# EAGLE board 13A-777-A-XA (EAGLE 9.6.2)
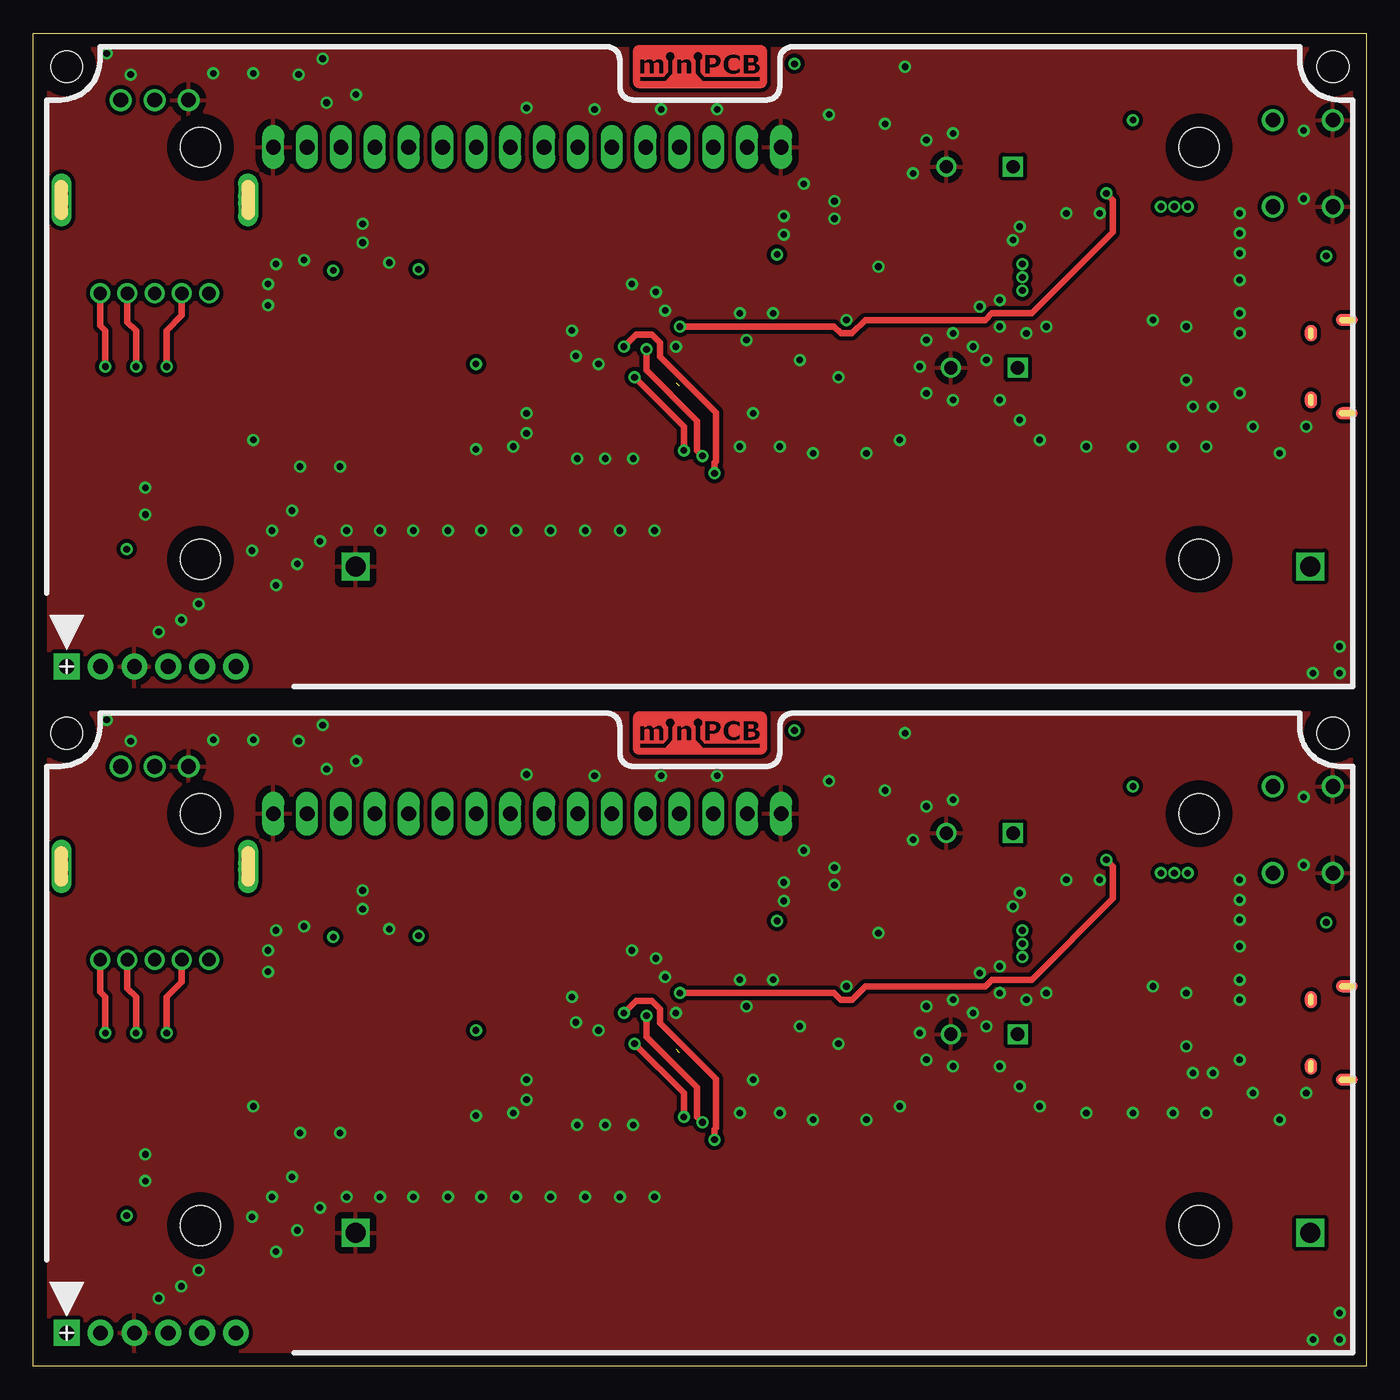
[diagram p0: board, top side]
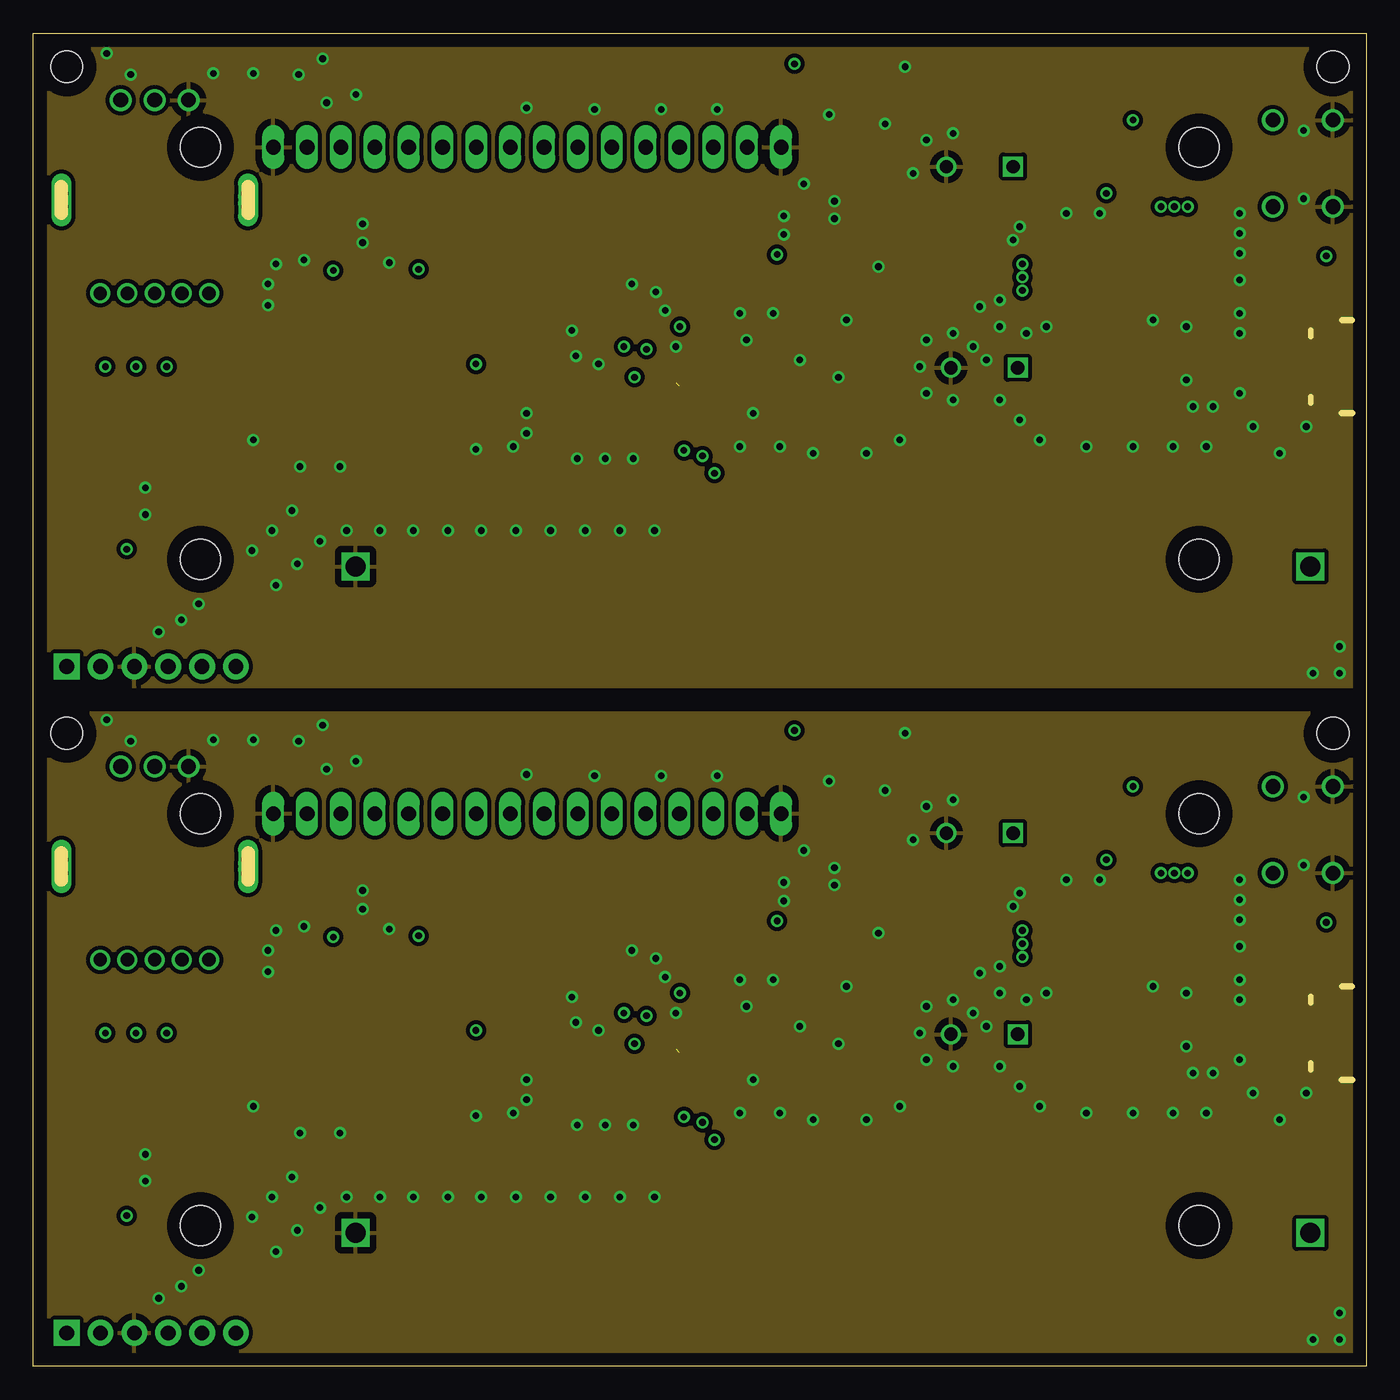
[diagram p1: board, inner layer Route2]
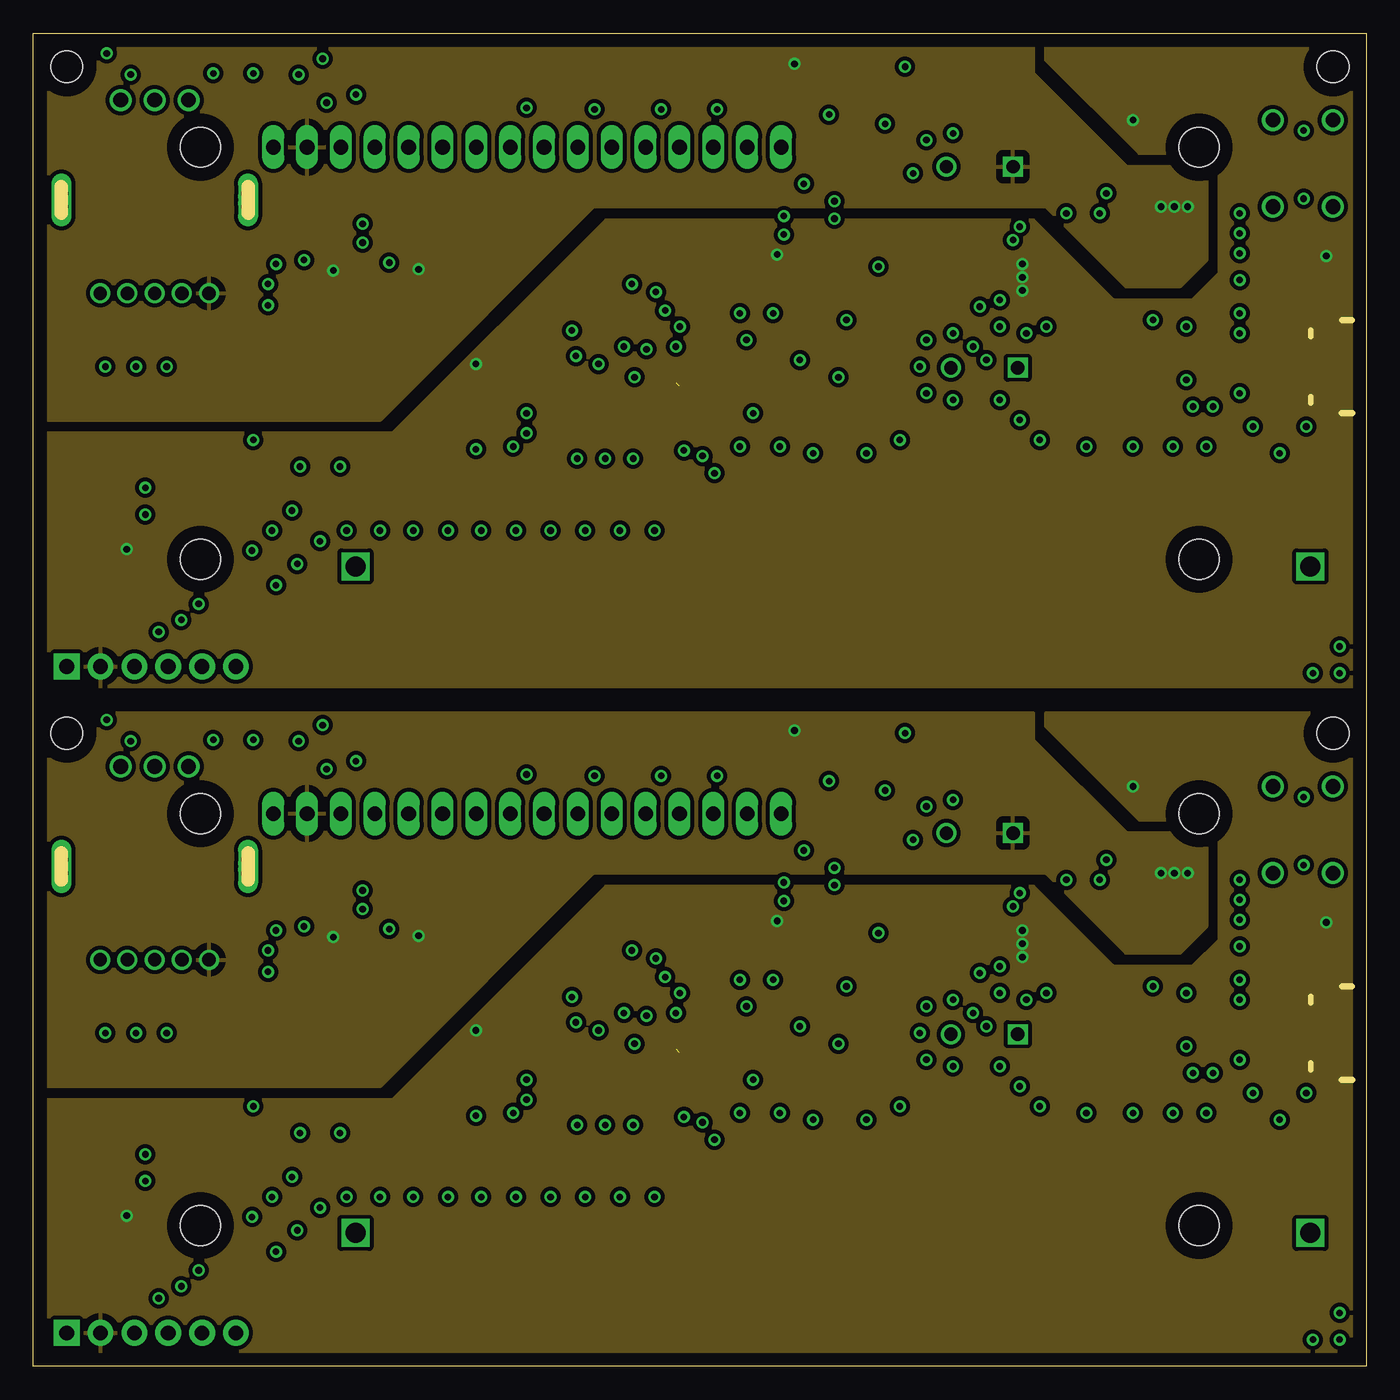
[diagram p2: board, inner layer Route15]
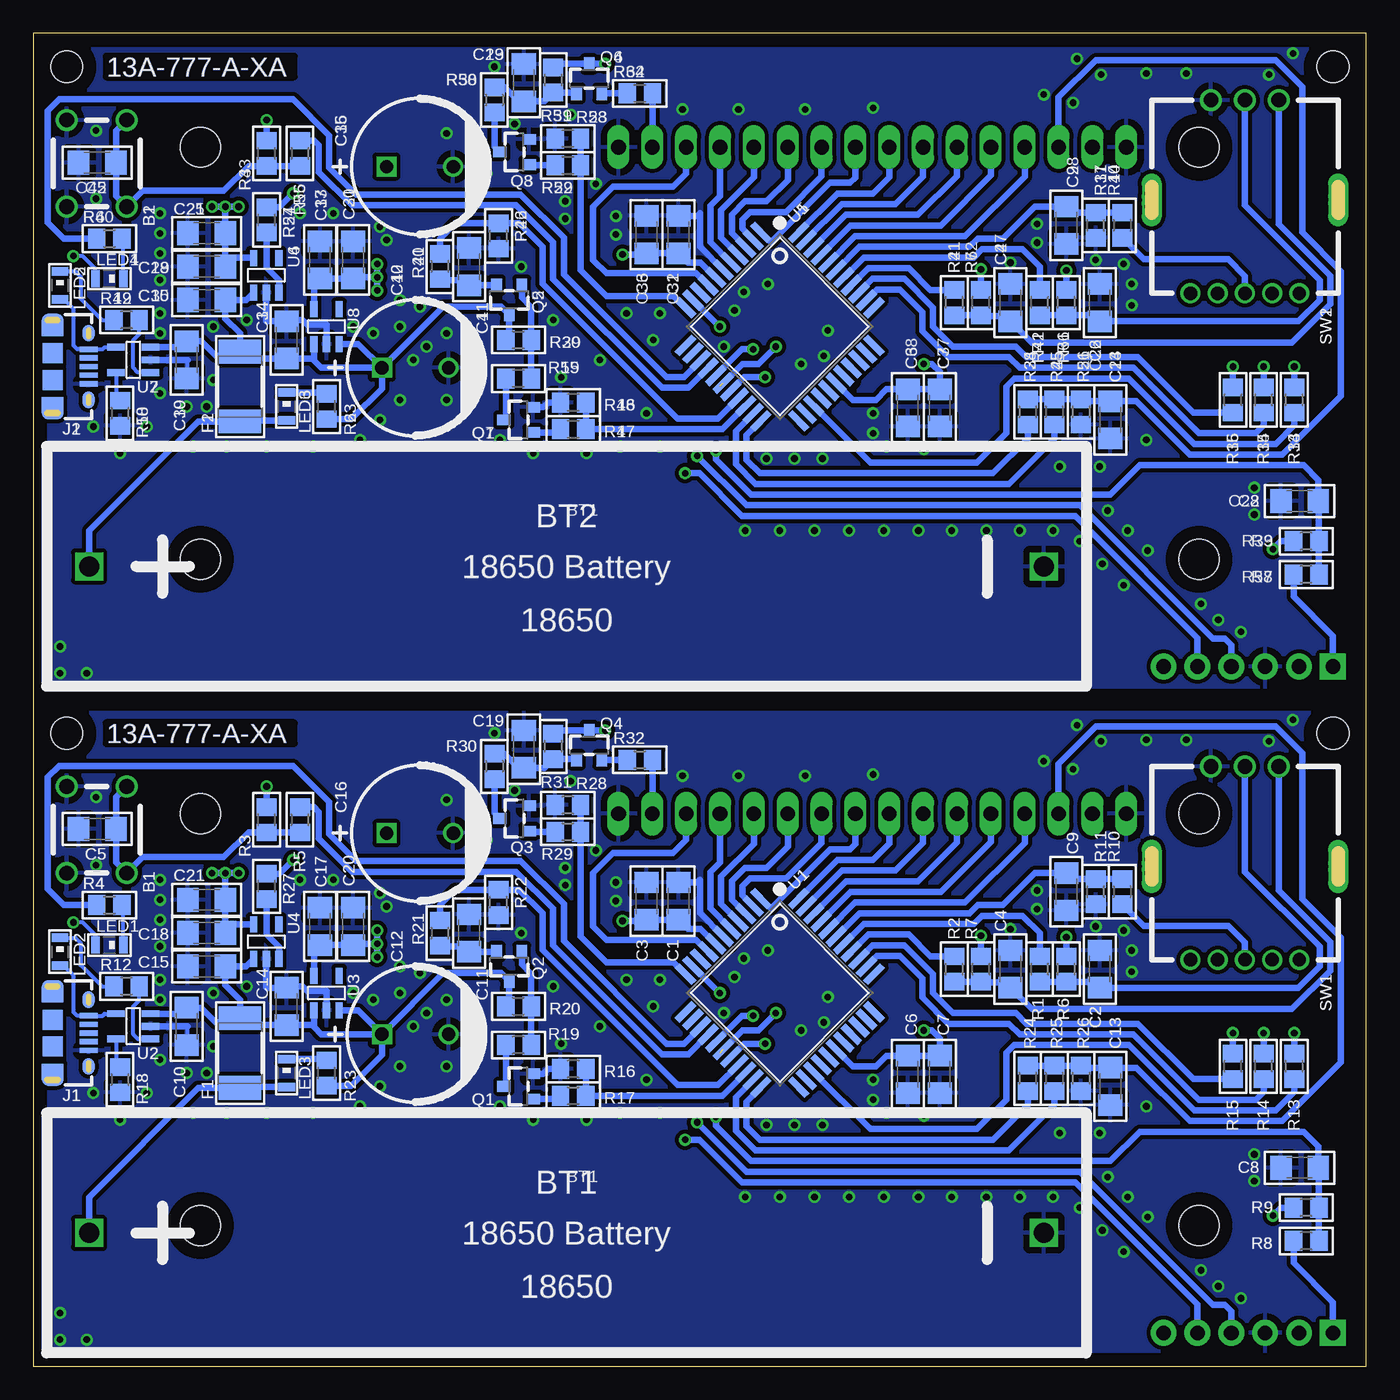
[diagram p3: board, bottom side, seen from below]

Size 100 x 100 mm. Coordinates in mm from the lower left corner, seen from the top.
Outline: 0,0 0,100 100,100 100,0 0,0
Copper layers (1+2*15+16): Top 0.035mm / dielectric 0.15mm / Route2 0.035mm / dielectric 0.15mm / Route15 0.035mm / dielectric 0.2mm / Bottom 0.035mm
Design rules "minipcb-SMD": minimum track width 0.25mm, minimum drill 0.5mm, track to track 0.3mm, track to pad 0.3mm, pad to pad 0.15mm, via to via 0.3mm, smd to smd 0.15mm, copper to edge 1mm, drill to drill 1mm, minimum pad ring 0.2mm, minimum via ring 0.2mm, stop-mask expansion 0.1mm, vias tented up to drill 0.55mm, thermal gap 0.5mm

## Footprints (pad centres in the part's own frame; a part is rotated, then mirrored left to right if it is on the bottom)
6X6MM = drill 1.1: 1.A 0,0; 2.A 6.5,0; 3.B 0,4.5; 4.B 6.5,4.5
BATTERY-18650-1-NOHOLES = drill 1.5 square: 1 35.82,0; + -35.82,0
C1206 = smd 1.6 x 1.8: + -1.4,0; - 1.4,0
C5MM = drill 1 square: + -2.5,0 | drill 1: - 2.5,0
1812L010DR = smd 1.78 x 3.15: 1 -2.615,0; 2 2.615,0
USB_MICRO = smd 0.4 x 1.35: 1 -1.3,1.35; 2 -0.65,1.35; 3 0,1.35; 4 0.65,1.35; 5 1.3,1.35 | smd 1.25 x 0.9: GND1 -2.5,1.35; GND4 2.5,1.35 | smd 1.25 x 0.9 bottom: GND2 -2.5,1.35; GND3 2.5,1.35 | smd 0.9 x 1.6: GND5 -3.5,-1.35; GND8 3.5,-1.35 | smd 0.9 x 1.6 bottom: GND6 -3.5,-1.35; GND9 3.5,-1.35 | smd 1.2 x 1.6: GND7 -2.9,-1.35; GND10 2.9,-1.35 | smd 1.5 x 1.5: XPAD3 -1,-1.35; XPAD4 1,-1.35
CHIP-LED0805 = smd 1.27 x 0.635: A 0,-1.05; C 0,1.05
MINIPCB_0P_50X100MM = hole 2.4: 97.5,47.5; 2.5,47.5
SOT23 = smd 0.8 x 1: 1 -0.95,-1.1; 2 0.95,-1.1; 3 0,1.1
R0805 = smd 1.3 x 1.5: 1 -0.95,0; 2 0.95,0
SWITCH-ROTARY_ENCODER-12MM = drill 1: 1 7,4.08; 2 7,2.04; 3 7,0; 4 7,-2.04; 5 7,-4.08 | drill 1.1: A -7.5,2.54; B -7.5,0; C -7.5,-2.54 | drill 1 long: GND1 -0.5,7; GND2 0.5,7; GND3 -0.5,-7; GND4 0.5,-7
SQFP-S-10X10-44 = smd 0.5 x 1.8: 1 -4,-6; 2 -3.2,-6; 3 -2.4,-6; 4 -1.6,-6; 5 -0.8,-6; 6 0,-6; 7 0.8,-6; 8 1.6,-6; 9 2.4,-6; 10 3.2,-6; 11 4,-6; 23 4,6; 24 3.2,6; 25 2.4,6; 26 1.6,6; 27 0.8,6; 28 0,6; 29 -0.8,6; 30 -1.6,6; 31 -2.4,6; 32 -3.2,6; 33 -4,6 | smd 1.8 x 0.5: 12 6,-4; 13 6,-3.2; 14 6,-2.4; 15 6,-1.6; 16 6,-0.8; 17 6,0; 18 6,0.8; 19 6,1.6; 20 6,2.4; 21 6,3.2; 22 6,4; 34 -6,4; 35 -6,3.2; 36 -6,2.4; 37 -6,1.6; 38 -6,0.8; 39 -6,0; 40 -6,-0.8; 41 -6,-1.6; 42 -6,-2.4; 43 -6,-3.2; 44 -6,-4
SOT-23-5_MC_MCH = smd 1.321 x 0.508: 1 -1.295,0.95; 2 -1.295,0; 3 -1.295,-0.95; 4 1.295,-0.95; 5 1.295,0.95
SOT25 = smd 0.55 x 1.2: 1 -0.95,-1.3; 2 0,-1.3; 3 0.95,-1.3; 4 0.95,1.3; 5 -0.95,1.3
PINS_6_PICKIT3 = drill 1.1 pad 1.93 square: 1 0,0 | drill 1.1 pad 1.93: 2 0,-2.54; 3 0,-5.08; 4 0,-7.62; 5 0,-10.16; 6 0,-12.7
LCD1602 = drill 1.1 long: 1 8,33.46; 2 10.54,33.46; 3 13.08,33.46; 4 15.62,33.46; 5 18.16,33.46; 6 20.7,33.46; 7 23.24,33.46; 8 25.78,33.46; 9 28.32,33.46; 10 30.86,33.46; 11 33.4,33.46; 12 35.94,33.46; 13 38.48,33.46; 14 41.02,33.46; 15 43.56,33.46; 16 46.1,33.46 | hole 3: 2.54,2.54; 2.54,33.46; 77.46,33.46; 77.46,2.54

## Placement (x,y rotation side)
B1  [6X6MM]  97.5,43.5 270 bottom
B2  [6X6MM]  97.5,93.5 270 bottom
BT1  18650  [BATTERY-18650-1-NOHOLES]  60,10 0 bottom
BT2  18650  [BATTERY-18650-1-NOHOLES]  60,60 0 bottom
C1  680n  [C1206]  51.6,34.9 90 bottom
C2  680n  [C1206]  20,29.8 90 bottom
C3  6n8  [C1206]  54,34.9 90 bottom
C4  680n  [C1206]  26.7,29.8 90 bottom
C5  680n  [C1206]  95.2,40.3 180 bottom
C6  680n  [C1206]  34.4,21.9 270 bottom
C7  6n8  [C1206]  32,21.9 270 bottom
C8  680n  [C1206]  5,14.9 180 bottom
C9  680n  [C1206]  22.5,35.6 270 bottom
C10  4u7  [C1206]  88.5,25.5 270 bottom
C11  680n  [C1206]  67.3,32.5 90 bottom
C12  22u 25V  [C5MM]  71.35,24.91 0 bottom
C13  680n  [C1206]  19.2,21 270 bottom
C14  680n  [C1206]  81,27 90 bottom
C15  680n  [C1206]  87,30 180 bottom
C16  22u 25V  [C5MM]  71,40 0 bottom
C17  6n8  [C1206]  78.5,33 90 bottom
C18  6n8  [C1206]  87,32.5 180 bottom
C19  680n  [C1206]  63.2,46.3 90 bottom
C20  680n  [C1206]  76,33 90 bottom
C21  680n  [C1206]  87,35 180 bottom
C22  680n  [C1206]  5,64.9 180 bottom
C23  680n  [C1206]  63.2,96.3 90 bottom
C24  680n  [C1206]  19.2,71 270 bottom
C25  680n  [C1206]  87,85 180 bottom
C26  680n  [C1206]  20,79.8 90 bottom
C27  680n  [C1206]  26.7,79.8 90 bottom
C28  680n  [C1206]  22.5,85.6 270 bottom
C29  6n8  [C1206]  87,82.5 180 bottom
C30  680n  [C1206]  87,80 180 bottom
C31  680n  [C1206]  76,83 90 bottom
C32  680n  [C1206]  51.6,84.9 90 bottom
C33  6n8  [C1206]  78.5,83 90 bottom
C34  680n  [C1206]  81,77 90 bottom
C35  22u 25V  [C5MM]  71,90 0 bottom
C36  6n8  [C1206]  54,84.9 90 bottom
C37  6n8  [C1206]  32,71.9 270 bottom
C38  680n  [C1206]  34.4,71.9 270 bottom
C39  4u7  [C1206]  88.5,75.5 270 bottom
C40  22u 25V  [C5MM]  71.35,74.91 0 bottom
C41  680n  [C1206]  67.3,82.5 90 bottom
C42  680n  [C1206]  95.2,90.3 180 bottom
E$1  [MINIPCB_PANEL_IMAGEFRAME]  -25,-30 0 top  (outside the outline)
F1  1A  [1812L010DR]  84.5,23.5 90 bottom
F2  1A  [1812L010DR]  84.5,73.5 90 bottom
J1  [USB_MICRO]  97.2,25 270 bottom
J2  [USB_MICRO]  97.2,75 270 bottom
LED1  [CHIP-LED0805]  94.3,31.6 270 bottom
LED2  [CHIP-LED0805]  98,31.1 0 bottom
LED3  [CHIP-LED0805]  81,22 0 bottom
LED4  [CHIP-LED0805]  94.3,81.6 270 bottom
LED5  [CHIP-LED0805]  98,81.1 0 bottom
LED6  [CHIP-LED0805]  81,72 0 bottom
PCB  PCB-50/100-0  [MINIPCB_0P_50X100MM]  0,0 0 top
PCB1  PCB-50/100-0  [MINIPCB_0P_50X100MM]  0,50 0 top
Q1  2N7002  [SOT23]  63.6,21 90 bottom
Q2  NTR2101P  [SOT23]  64.3,30 180 bottom
Q3  2N7002  [SOT23]  63.9,41.1 90 bottom
Q4  NTR2101P  [SOT23]  58.3,46.6 0 bottom
Q5  NTR2101P  [SOT23]  64.3,80 180 bottom
Q6  NTR2101P  [SOT23]  58.3,96.6 0 bottom
Q7  2N7002  [SOT23]  63.6,71 90 bottom
Q8  2N7002  [SOT23]  63.9,91.1 90 bottom
R1  10k  [R0805]  24.5,29.8 90 bottom
R2  10k  [R0805]  30.9,29.8 90 bottom
R3  10K  [R0805]  82.5,41 90 bottom
R4  150  [R0805]  94.3,34.6 0 bottom
R5  10K  [R0805]  80,41 270 bottom
R6  10k  [R0805]  22.5,29.8 90 bottom
R7  10k  [R0805]  28.9,29.8 90 bottom
R8  150  [R0805]  4.5,9.4 180 bottom
R9  10k  [R0805]  4.5,11.9 180 bottom
R10  10K  [R0805]  18.3,35.6 270 bottom
R11  499K  [R0805]  20.3,35.6 90 bottom
R12  150  [R0805]  93,28.5 180 bottom
R13  150  [R0805]  5.4,22.5 90 bottom
R14  150  [R0805]  7.7,22.5 90 bottom
R15  150  [R0805]  10,22.5 90 bottom
R16  10k  [R0805]  59.5,22.3 180 bottom
R17  10k  [R0805]  59.5,20.3 0 bottom
R18  2K  [R0805]  93.5,21.5 270 bottom
R19  10k  [R0805]  63.6,24.1 180 bottom
R20  499K  [R0805]  63.6,27 0 bottom
R21  4K99  [R0805]  69.5,32.5 270 bottom
R22  4K99  [R0805]  65.1,34.8 90 bottom
R23  150  [R0805]  78,22 90 bottom
R24  1K  [R0805]  25.4,21.6 270 bottom
R25  1K  [R0805]  23.4,21.6 270 bottom
R26  1K  [R0805]  21.4,21.6 270 bottom
R27  150  [R0805]  82.5,36 90 bottom
R28  10k  [R0805]  59.9,42.1 180 bottom
R29  10k  [R0805]  59.9,40.1 0 bottom
R30  10k  [R0805]  65.4,45 270 bottom
R31  499K  [R0805]  61,46.5 270 bottom
R32  150  [R0805]  54.5,45.5 0 bottom
R33  10k  [R0805]  4.5,61.9 180 bottom
R34  150  [R0805]  5.4,72.5 90 bottom
R35  150  [R0805]  7.7,72.5 90 bottom
R36  150  [R0805]  10,72.5 90 bottom
R37  499K  [R0805]  20.3,85.6 90 bottom
R38  1K  [R0805]  25.4,71.6 270 bottom
R39  499K  [R0805]  63.6,77 0 bottom
R40  4K99  [R0805]  69.5,82.5 270 bottom
R41  10k  [R0805]  30.9,79.8 90 bottom
R42  10k  [R0805]  24.5,79.8 90 bottom
R43  10K  [R0805]  82.5,91 90 bottom
R44  10K  [R0805]  18.3,85.6 270 bottom
R45  1K  [R0805]  23.4,71.6 270 bottom
R46  4K99  [R0805]  65.1,84.8 90 bottom
R47  10k  [R0805]  59.5,70.3 0 bottom
R48  10k  [R0805]  59.5,72.3 180 bottom
R49  150  [R0805]  93,78.5 180 bottom
R50  2K  [R0805]  93.5,71.5 270 bottom
R51  1K  [R0805]  21.4,71.6 270 bottom
R52  10k  [R0805]  59.9,90.1 0 bottom
R53  10k  [R0805]  59.9,92.1 180 bottom
R54  150  [R0805]  82.5,86 90 bottom
R55  10k  [R0805]  63.6,74.1 180 bottom
R56  10K  [R0805]  80,91 270 bottom
R57  150  [R0805]  4.5,59.4 180 bottom
R58  10k  [R0805]  65.4,95 270 bottom
R59  499K  [R0805]  61,96.5 270 bottom
R60  150  [R0805]  94.3,84.6 0 bottom
R61  10k  [R0805]  22.5,79.8 90 bottom
R62  10k  [R0805]  28.9,79.8 90 bottom
R63  150  [R0805]  78,72 90 bottom
R64  150  [R0805]  54.5,95.5 0 bottom
SW1  PEL12T  [SWITCH-ROTARY_ENCODER-12MM]  9.1,37.5 270 bottom
SW2  PEL12T  [SWITCH-ROTARY_ENCODER-12MM]  9.1,87.5 270 bottom
U1  PIC16F1789T-I/PT  [SQFP-S-10X10-44]  44,28 225 bottom
U2  MCP73831  [SOT-23-5_MC_MCH]  92.5,25.5 180 bottom
U3  ADP150AUJZ-3.3-R7  [SOT25]  78,28 0 bottom
U4  ADP150AUJZ-3.3-R7  [SOT25]  82.52,31.85 0 bottom
U5  PIC16F1789T-I/PT  [SQFP-S-10X10-44]  44,78 225 bottom
U6  ADP150AUJZ-3.3-R7  [SOT25]  82.52,81.85 0 bottom
U7  MCP73831  [SOT-23-5_MC_MCH]  92.5,75.5 180 bottom
U8  ADP150AUJZ-3.3-R7  [SOT25]  78,78 0 bottom
U$1  PICKIT3ARROW  [PINS_6_PICKIT3]  2.5,2.5 90 top
U$2  PICKIT3ARROW  [PINS_6_PICKIT3]  2.5,52.5 90 top
X1  HD44780LCD-1602  [LCD1602]  10,8 0 top
X2  HD44780LCD-1602  [LCD1602]  10,58 0 top

## Library data of the parts
B1 B2 BT1 BT2 C1-C42 E$1 J1 J2 LED1-LED6 Q1-Q8 R1-R64 SW1 SW2 U1 U3-U6 U8 U$1 U$2 X1 X2 = minipcb
F1 F2 = minipcb; ARROW_PART_NUMBER: 1812L050/60MR; ARROW_PRICE-STOCK: https://www.arrow.com/en/products/1812l05060mr/littelfuse?region=nac; DESCRIPTION: Resettable Fuses - PPTC PTC 60V POLYFUSE SURF MOUNT 1812 0.5A; HEIGHT: 1.25mm; MANUFACTURER_NAME: LITTELFUSE; MANUFACTURER_PART_NUMBER: 1812L050/60MR; MOUSER_PART_NUMBER: 576-1812L050/60MR; MOUSER_PRICE-STOCK: https://www.mouser.co.uk/ProductDetail/Littelfuse/1812L050-60MR?qs=lM4gFlnEeEOTL6GzziLnSw%3D%3D
PCB PCB1 = minipcb; PART_NUMBER: 13A-777-A-XA; REVISION: A
U2 U7 = minipcb; COPYRIGHT: Copyright (C) 2023 Ultra Librarian. All rights reserved.; MANUFACTURER_PART_NUMBER: MCP73831T-2ATI/OT; MFR_NAME: Microchip

## Nets
+3V1: C31.+ C32.+ C33.+ C36.+ C37.+ C38.+ LED4.A R33.2 R43.2 U5.7 U5.28 U8.5 U$2.2
+3V3: C1.+ C3.+ C6.+ C7.+ C17.+ C20.+ LED1.A R3.2 R9.2 U1.7 U1.28 U3.5 U$1.2
+3V3-LCD: C16.+ C18.+ C21.+ Q4.3 R6.2 R7.2 R31.1 SW1.5 U4.5 X1.2
+3V3-LCD1: C25.+ C29.+ C35.+ Q6.3 R59.1 R61.2 R62.2 SW2.5 U6.5 X2.2
B1: B1.3.B B1.4.B C5.+ R3.1 R5.2
B2: B2.3.B B2.4.B C42.+ R43.1 R56.2
BT+: BT1.+ F1.1 LED3.A
BT+1: BT2.+ F2.1 LED6.A
BUTTON: R5.1 U1.15
BUTTON1: R56.1 U5.15
ENC_A: R1.2 U1.38
ENC_A1: R42.2 U5.38
ENC_B: R2.2 U1.37
ENC_B1: R41.2 U5.37
ENC_BLUE: R15.1 U1.36
ENC_BLUE1: R36.1 U5.36
ENC_GREEN: R14.1 U1.35
ENC_GREEN1: R35.1 U5.35
ENC_RED: R13.1 U1.25
ENC_RED1: R34.1 U5.25
ENC_SW: C9.+ R10.1 R11.2 U1.39
ENC_SW1: C28.+ R37.2 R44.1 U5.39
GND: B1.1.A B1.2.A BT1.1 C1.- C2.- C3.- C4.- C5.- C6.- C7.- C8.- C9.- C10.- C11.- C12.- C13.- C14.- C15.- C16.- C17.- C18.- C19.- C20.- C21.- J1.5 Q1.2 Q3.2 R11.1 R16.2 R18.2 R22.1 R26.2 R28.2 SW1.C U1.6 U1.29 U2.2 U3.2 U4.2 U$1.3 X1.1 X1.16
GND1: B2.1.A B2.2.A BT2.1 C22.- C23.- C24.- C25.- C26.- C27.- C28.- C29.- C30.- C31.- C32.- C33.- C34.- C35.- C36.- C37.- C38.- C39.- C40.- C41.- C42.- J2.5 Q7.2 Q8.2 R37.1 R46.1 R48.2 R50.2 R51.2 R53.2 SW2.C U5.6 U5.29 U6.2 U7.2 U8.2 U$2.3 X2.1 X2.16
ICSPCLK: U1.17 U$1.5
ICSPCLK1: U5.17 U$2.5
ICSPDAT: U1.16 U$1.4
ICSPDAT1: U5.16 U$2.4
LCD-BACKLIGHT-A: R32.2 X1.15
LCD-BACKLIGHT-A1: R64.2 X2.15
LCD-BACKLIGHT-ENABLE: R28.1 R29.2 U1.11
LCD-BACKLIGHT-ENABLE1: R52.2 R53.1 U5.11
LCD-D0: U1.43 X1.7
LCD-D1: U1.44 X1.8
LCD-D2: U1.1 X1.9
LCD-D3: U1.2 X1.10
LCD-D4: U1.3 X1.11
LCD-D5: U1.4 X1.12
LCD-D6: U1.5 X1.13
LCD-D7: U1.8 X1.14
LCD-D8: U5.44 X2.8
LCD-D9: U5.1 X2.9
LCD-D10: U5.2 X2.10
LCD-D11: U5.43 X2.7
LCD-D12: U5.3 X2.11
LCD-D13: U5.4 X2.12
LCD-D14: U5.5 X2.13
LCD-D15: U5.8 X2.14
LCD-RE: U1.42 X1.6
LCD-RE1: U5.42 X2.6
LCD-RS: U1.40 X1.4
LCD-RS1: U5.40 X2.4
LCD-RW: U1.41 X1.5
LCD-RW1: U5.41 X2.5
LCD-V0: C13.+ R24.1 R25.1 R26.1 X1.3
LCD-V1: C24.+ R38.1 R45.1 R51.1 X2.3
LCD_ENABLE: R27.2 U1.10
LCD_ENABLE1: R54.2 U5.10
LED1: R4.1 U1.14
LED1.K: LED1.C R4.2
LED1.K1: LED4.C R60.2
LED2: R60.1 U5.14
LED2.K: LED2.C R12.2
LED2.K1: LED5.C R49.2
LED3K: LED3.C R23.2
LED3K1: LED6.C R63.2
MCLR: C8.+ R8.1 R9.1 U1.18
MCLR1: C22.+ R33.1 R57.1 U5.18
P1-1: R8.2 U$1.1
P1-2: R57.2 U$2.1
PROG: R18.1 U2.5
PROG1: R50.1 U7.5
Q1.D: Q1.3 R19.2
Q1.D1: Q7.3 R55.2
Q1.G: Q1.1 R17.1
Q1.G1: Q7.1 R47.1
Q2.G: Q2.1 R19.1 R20.2
Q2.G1: Q5.1 R39.2 R55.1
Q2.S: C11.+ Q2.2 R21.2
Q2.S1: C41.+ Q5.2 R40.2
Q3.D: Q3.3 R30.2
Q3.D1: Q8.3 R58.2
Q3.G: Q3.1 R29.1
Q3.G1: Q8.1 R52.1
Q4.G: C19.+ Q4.1 R30.1 R31.2
Q4.G1: C23.+ Q6.1 R58.1 R59.2
Q4.S: Q4.2 R32.1
Q4.S1: Q6.2 R64.1
RA0: R21.1 R22.2 U1.19
RA1: R16.1 R17.2 U1.20
RA2: R25.2 U1.21
RA3: R24.2 U1.22
RA4: R45.2 U5.21
RA5: R40.1 R46.2 U5.19
RA6: R38.2 U5.22
RA7: R47.2 R48.1 U5.20
SW1.1: R13.2 SW1.1
SW1.2: R14.2 SW1.2
SW1.3: R10.2 SW1.3
SW1.4: R15.2 SW1.4
SW1.5: R34.2 SW2.1
SW1.6: R35.2 SW2.2
SW1.7: R36.2 SW2.4
SW1.8: R44.2 SW2.3
SW1.A: C2.+ R1.1 R6.1 SW1.B
SW1.A1: C26.+ R42.1 R61.1 SW2.B
SW1.B: C4.+ R2.1 R7.1 SW1.A
SW1.B1: C27.+ R41.1 R62.1 SW2.A
U4.1: R12.1 U2.1
U4.2: R49.1 U7.1
U4.3: R27.1 U4.3
U4.4: R54.1 U6.3
VBAT: C10.+ C12.+ C14.+ C15.+ F1.2 Q2.3 R20.1 R23.1 U2.3 U3.1 U3.3 U4.1
VBAT1: C30.+ C34.+ C39.+ C40.+ F2.2 Q5.3 R39.1 R63.1 U6.1 U7.3 U8.1 U8.3
VUSB: J1.1 LED2.A U2.4
VUSB1: J2.1 LED5.A U7.4

## Tracks (layer width: path | path; a pad name or v marks a point on that pad's centre or on a via)
+3V1  (via drill 0.5)
  Bottom 0.3: LED4.A 95.35,82.35 96.3,83.3 v97,83.3
  Bottom 0.5: U5.7 49.93,82.8 50.9,82.8 C32.+ C36.+ 54.1,83.4 v55.8,83.4 | U5.28 38.5,72.5 36.8,72.5 36,73.3 C38.+ C37.+ 32,74.61 32.59,75.2 v33.2,75.2 | R43.2 v82.5,93.5 | v74.2,82.7 v74.2,81.7 | v74.2,81.7 v74.2,80.7 | v74.2,81.7 75.9,81.7 C31.+ C33.+ 78.95,81.15 U8.5 | R33.2 6.4,61.9 v7,61.3
  pour Route15: 99,51 1,51 1,70 27,70 43,86 75,86 81,80 87,80 89,82 89,91 83,91 76,98 76,99 99,99
+3V3  (via drill 0.5)
  Bottom 0.3: LED1.A 95.35,32.35 96.3,33.3 v97,33.3
  Bottom 0.5: U1.7 49.93,32.8 50.9,32.8 C1.+ C3.+ 54.1,33.4 v55.8,33.4 | U1.28 38.5,22.5 36.8,22.5 36,23.3 C6.+ C7.+ 32,24.61 32.59,25.2 v33.2,25.2 | R3.2 v82.5,43.5 | v74.2,32.7 v74.2,31.7 | v74.2,31.7 v74.2,30.7 | v74.2,31.7 75.9,31.7 C20.+ C17.+ 78.95,31.15 U3.5 | R9.2 6.4,11.9 v7,11.3
  pour Route15: 99,1 1,1 1,20 27,20 43,36 75,36 81,30 87,30 89,32 89,41 83,41 76,48 76,49 99,49
+3V3-LCD  (via drill 0.5)
  Bottom 0.5: R31.1 60.75,47.7 Q4.3 v57.1,47.7 | v86.6,37 v84.6,37 | v85.6,37 C21.+ C18.+ 84.95,33.15 U4.5 | v22.5,32.2 R6.2 | R7.2 v28.9,32.3
  pour Route15: 75,49 75,47 82,40 88,40 88,33 86,31 82,31 76,37 42,37 26,21 1,21 1,49
+3V3-LCD1  (via drill 0.5)
  Bottom 0.5: R59.1 60.75,97.7 Q6.3 v57.1,97.7 | v86.6,87 v84.6,87 | v85.6,87 C25.+ C29.+ 84.95,83.15 U6.5 | v22.5,82.2 R61.2 | R62.2 v28.9,82.3
  pour Route15: 75,99 75,97 82,90 88,90 88,83 86,81 82,81 76,87 42,87 26,71 1,71 1,99
B1
  Bottom 0.5: B1.3.B 93.8,42.7 C5.+ 93.8,37.8 B1.4.B 91.8,38.2 85.7,38.2 83.85,40.05 R3.1 R5.2
B2
  Bottom 0.5: B2.3.B 93.8,92.7 C42.+ 93.8,87.8 B2.4.B 91.8,88.2 85.7,88.2 83.85,90.05 R43.1 R56.2
BT+
  Bottom 0.5: BT1.+ 95.82,12.68 87.61,20.89 F1.1 84.44,20.95 LED3.A
BT+1
  Bottom 0.5: BT2.+ 95.82,62.68 87.61,70.89 F2.1 84.44,70.95 LED6.A
BUTTON
  Bottom 0.5: U1.15 50.86,23.4 52.84,23.4 61,31.56 61,34.33 63.77,37.1 76.1,37.1 78.6,39.6 78.6,41.6 78.95,41.95 R5.1
BUTTON1
  Bottom 0.5: U5.15 50.86,73.4 52.84,73.4 61,81.56 61,84.33 63.77,87.1 76.1,87.1 78.6,89.6 78.6,91.6 78.95,91.95 R56.1
ENC_A
  Bottom 0.5: R1.2 24.5,32.5 25.8,33.8 28.81,33.8 29.44,33.18 37.69,33.18 U1.38
ENC_A1
  Bottom 0.5: R42.2 24.5,82.5 25.8,83.8 28.81,83.8 29.44,83.18 37.69,83.18 U5.38
ENC_B
  Bottom 0.5: U1.37 37.36,32.38 34.31,32.38 32.69,30.75 R2.2
ENC_B1
  Bottom 0.5: U5.37 37.36,82.38 34.31,82.38 32.69,80.75 R41.2
ENC_BLUE
  Bottom 0.5: U1.36 37.03,31.58 34.65,31.58 32.5,29.43 32.5,28 31,26.5 26.3,26.5 25.5,25.7 17.14,25.7 12.99,21.55 R15.1
ENC_BLUE1
  Bottom 0.5: U5.36 37.03,81.58 34.65,81.58 32.5,79.43 32.5,78 31,76.5 26.3,76.5 25.5,75.7 17.14,75.7 12.99,71.55 R36.1
ENC_GREEN
  Bottom 0.5: R14.1 7.7,20.6 8.3,20 12.57,20 17.47,24.9 26,24.9 26.8,25.7 31.33,25.7 33.3,27.67 33.3,29.08 35,30.78 | 34.98,30.78 35,30.78 | 35,30.78 36.7,30.78 U1.35 37.54,29.94
ENC_GREEN1
  Bottom 0.5: R35.1 7.7,70.6 8.3,70 12.57,70 17.47,74.9 26,74.9 26.8,75.7 31.33,75.7 33.3,77.67 33.3,79.08 35,80.78 | 34.98,80.78 35,80.78 | 35,80.78 36.7,80.78 U5.35 37.54,79.94
ENC_RED
  Bottom 0.5: U1.25 37.19,17.8 29.2,17.8 27,20 27,23.5 26.4,24.1 17.8,24.1 12.9,19.2 6.8,19.2 5.4,20.6 R13.1
ENC_RED1
  Bottom 0.5: U5.25 37.19,67.8 29.2,67.8 27,70 27,73.5 26.4,74.1 17.8,74.1 12.9,69.2 6.8,69.2 5.4,70.6 R34.1
ENC_SW
  Bottom 0.5: R10.1 R11.2 22.05,36.55 C9.+ 24.87,37 27.27,34.6 29.15,34.6 29.77,33.98 38.02,33.98 U1.39
ENC_SW1
  Bottom 0.5: R44.1 R37.2 22.05,86.55 C28.+ 24.87,87 27.27,84.6 29.15,84.6 29.77,83.98 38.02,83.98 U5.39
GND  (via drill 0.5)
  Bottom 0.3: 88.4,25.5 88.4,24.2 C10.-
  Bottom 0.5: U4.2 82.52,28.42 82.5,28.4 C14.- 80.9,28.5 79.8,28.5 79.78,28.48 79.78,28.47 79.45,28.15 78,28.15 U3.2 | Q1.2 61.75,21.95 61.4,22.3 R16.2 | U2.2 88.4,25.5 | U1.6 50,34 50,36.5 50.2,36.3 C1.-
  other vias: 26.7,32.8 24.7,34.3 20.3,33 17.6,31.2 17.6,29.6 18.2,32.7 16.5,19.5 20,17.5 23,17.5 8.4,15.9 8.4,13.9 40.7,25.8 33.2,18.8 36,19 56.3,36.3 56.3,34.9 37,20 37,21.5 46.7,30.6 63.4,32.5 60.4,24.2 65,19.5 62.5,18.5 58.5,18.5 69,27.5 69,22.5 66.5,25 67,23 67,27 69,42.5 67,42 66,39.5 63.9,43.2 59.7,43.9 65.4,47.5 7.3,46.9 19.9,46.9 22,44.8 21.7,48.1 24.2,45.4 24.7,35.7 12.4,7.2 11.1,6 9.4,5.1 19.8,10.2 23.5,12.7 21.5,11.9 26,12.7 18.2,8.6 19.4,14.2 17.9,12.7 16.4,11.2 56,19 53,19 54,21.5 61,28.5 57.5,25.5 47.4,29.2 44.9,31.2 40.4,27.7 42.4,25.2 91.5,20.5 95.5,20.5 93.5,18.5 88.5,22 86.5,24 90.5,23 84,28.5 74.5,27.5 76,28 73.5,34.5 74,35.5 77.5,36.5 80,36.5 90.5,27.5 90.5,29 90.5,31.5 90.5,33.5 90.5,35 90.5,36.5 86.5,28 87,22 88,19 85.5,19 82.5,19 79,19 75.5,19.5 74,21 72.5,28 71,29.5 71.5,25.5 70.5,26.5 72.5,22.5 95.3,42.7 95.3,37.6 98,2 98,4 96,2 5.5,48.5 16.5,47 13.5,47 72.5,30 55.5,29 53,29 53.5,27 48.2,26.5 45,18.1 42.9,18.1 40.8,18.1 46.6,12.7 44,12.7 41.4,12.7 38.8,12.7 36.2,12.7 33.6,12.7 31.1,12.7 28.5,12.7 60.1,37.4 60.1,36.1 57.8,38.7 51.3,44.3 47.1,44.3 42.1,44.3 37,44.4
  pour Bottom: 99,1 1,1 1,49 99,49
  pour Top: 99,1 1,1 1,49 99,49
  pour Route2: 99,1 1,1 1,49 99,49
GND1  (via drill 0.5)
  Bottom 0.3: 88.4,75.5 88.4,74.2 C39.-
  Bottom 0.5: U6.2 82.52,78.42 82.5,78.4 C34.- 80.9,78.5 79.8,78.5 79.78,78.47 79.45,78.15 78,78.15 U8.2 | Q7.2 61.75,71.95 61.4,72.3 R48.2 | U7.2 88.4,75.5 | U5.6 50,84 50,86.5 50.2,86.3 C32.-
  other vias: 26.7,82.8 24.7,84.3 20.3,83 17.6,81.2 17.6,79.6 18.2,82.7 16.5,69.5 20,67.5 23,67.5 8.4,65.9 8.4,63.9 40.7,75.8 33.2,68.8 36,69 56.3,86.3 56.3,84.9 37,70 37,71.5 46.7,80.6 63.4,82.5 60.4,74.2 65,69.5 62.5,68.5 58.5,68.5 69,77.5 69,72.5 66.5,75 67,73 67,77 69,92.5 67,92 66,89.5 63.9,93.2 59.7,93.9 65.4,97.5 7.3,96.9 19.9,96.9 22,94.8 21.7,98.1 24.2,95.4 24.7,85.7 12.4,57.2 11.1,56 9.4,55.1 19.8,60.2 23.5,62.7 21.5,61.9 26,62.7 18.2,58.6 19.4,64.2 17.9,62.7 16.4,61.2 56,69 53,69 54,71.5 61,78.5 57.5,75.5 47.4,79.2 44.9,81.2 40.4,77.7 42.4,75.2 91.5,70.5 95.5,70.5 93.5,68.5 88.5,72 86.5,74 90.5,73 84,78.5 74.5,77.5 76,78 73.5,84.5 74,85.5 77.5,86.5 80,86.5 90.5,77.5 90.5,79 90.5,81.5 90.5,83.5 90.5,85 90.5,86.5 86.5,78 87,72 88,69 85.5,69 82.5,69 79,69 75.5,69.5 74,71 72.5,78 71,79.5 71.5,75.5 70.5,76.5 72.5,72.5 95.3,92.7 95.3,87.6 98,52 98,54 96,52 5.5,98.5 16.5,97 13.5,97 72.5,80 55.5,79 53,79 53.5,77 48.2,76.5 45,68.1 42.9,68.1 40.8,68.1 46.6,62.7 44,62.7 41.4,62.7 38.8,62.7 36.2,62.7 33.6,62.7 31.1,62.7 28.5,62.7 60.1,87.4 60.1,86.1 57.8,88.7 51.3,94.3 47.1,94.3 42.1,94.3 37,94.4
  pour Bottom: 99,51 1,51 1,99 99,99
  pour Top: 99,51 1,51 1,99 99,99
  pour Route2: 99,51 1,51 1,99 99,99
ICSPCLK  (via drill 0.5)  (1 unrouted)
  Top 0.5: v51.1,17 51.1,17.79 51.2,17.89 51.2,21.55 47,25.75 47,26.8 46.4,27.4 45.2,27.4 v44.3,26.5
  Bottom 0.5: U$1.5 12.66,4.63 21.83,13.8 46.83,13.8 50.03,17 v51.1,17 | v44.3,26.5 45.6,25.2 46.8,25.2 48.48,23.52
ICSPCLK1  (via drill 0.5)  (1 unrouted)
  Top 0.5: v51.1,67 51.1,67.79 51.2,67.89 51.2,71.55 47,75.75 47,76.8 46.4,77.4 45.2,77.4 v44.3,76.5
  Bottom 0.5: U$2.5 12.66,54.63 21.83,63.8 46.83,63.8 50.03,67 v51.1,67 | v44.3,76.5 45.6,75.2 46.8,75.2 48.48,73.52
ICSPDAT  (via drill 0.5)
  Top 0.5: v50.2,18.3 49.8,18.7 49.8,20.91 46,24.71 46,25 v46,26.3
  Bottom 0.5: U$1.4 10.12,4.12 10.6,4.6 11.5,4.6 21.5,14.6 46.49,14.6 v50.19,18.3 v50.2,18.3 | U1.16 46.83,26.3 v46,26.3
ICSPDAT1  (via drill 0.5)
  Top 0.5: v50.2,68.3 49.8,68.7 49.8,70.91 46,74.71 46,75 v46,76.3
  Bottom 0.5: U$2.4 10.12,54.12 10.6,54.6 11.5,54.6 21.5,64.6 46.49,64.6 v50.19,68.3 v50.2,68.3 | U5.16 46.83,76.3 v46,76.3
LCD-BACKLIGHT-A
  Bottom 0.5: R32.2 X1.15
LCD-BACKLIGHT-A1
  Bottom 0.5: R64.2 X2.15
LCD-BACKLIGHT-ENABLE
  Bottom 0.5: R28.1 R29.2 58.95,32.25 57,30.3 51.96,30.3 U1.11
LCD-BACKLIGHT-ENABLE1
  Bottom 0.5: R53.1 R52.2 58.95,82.25 57,80.3 51.96,80.3 U5.11
LCD-D0
  Bottom 0.5: U1.43 39.35,37.18 35.32,37.18 33.24,39.26 X1.7
LCD-D1
  Bottom 0.5: U1.44 39.68,37.98 37.02,37.98 35.78,39.22 X1.8
LCD-D2
  Bottom 0.5: X1.9 38.32,39.18 38.72,38.78 40.22,38.78 44.67,34.33 U1.1
LCD-D3
  Bottom 0.5: U1.2 46.8,35.33 46.8,36.03 46.23,36.6 43.53,36.6 40.86,39.27 X1.10
LCD-D4
  Bottom 0.5: U1.3 47.6,34.99 47.6,36.4 46.6,37.4 45,37.4 43.4,39 X1.11
LCD-D5
  Bottom 0.5: U1.4 48.4,34.66 48.4,36.73 45.94,39.19 X1.12
LCD-D6
  Bottom 0.5: U1.5 49.2,34.33 49.2,37.06 48.48,37.78 X1.13
LCD-D7
  Bottom 0.5: U1.8 50.26,32 57,32 58,33 58,37 56.5,38.5 52,38.5 51.02,39.48 X1.14
LCD-D8
  Bottom 0.5: U5.44 39.68,87.98 37.02,87.98 35.78,89.22 X2.8
LCD-D9
  Bottom 0.5: X2.9 38.32,89.18 38.72,88.78 40.22,88.78 44.67,84.33 U5.1
LCD-D10
  Bottom 0.5: U5.2 46.8,85.33 46.8,86.03 46.23,86.6 43.53,86.6 40.86,89.27 X2.10
LCD-D11
  Bottom 0.5: U5.43 39.35,87.18 35.32,87.18 33.24,89.26 X2.7
LCD-D12
  Bottom 0.5: U5.3 47.6,84.99 47.6,86.4 46.6,87.4 45,87.4 43.4,89 X2.11
LCD-D13
  Bottom 0.5: U5.4 48.4,84.66 48.4,86.73 45.94,89.19 X2.12
LCD-D14
  Bottom 0.5: U5.5 49.2,84.33 49.2,87.06 48.48,87.78 X2.13
LCD-D15
  Bottom 0.5: U5.8 50.26,82 57,82 58,83 58,87 56.5,88.5 52,88.5 51.02,89.48 X2.14
LCD-RE
  Bottom 0.5: U1.42 39.02,36.38 33.62,36.38 30.7,39.3 X1.6
LCD-RE1
  Bottom 0.5: U5.42 39.02,86.38 33.62,86.38 30.7,89.3 X2.6
LCD-RS
  Bottom 0.5: U1.40 38.35,34.78 30.1,34.78 25.62,39.26 X1.4
LCD-RS1
  Bottom 0.5: U5.40 38.35,84.78 30.1,84.78 25.62,89.26 X2.4
LCD-RW
  Bottom 0.5: U1.41 38.69,35.58 31.92,35.58 28.16,39.34 X1.5
LCD-RW1
  Bottom 0.5: U5.41 38.69,85.58 31.92,85.58 28.16,89.34 X2.5
LCD-V0
  Bottom 0.5: R24.1 R25.1 R26.1 21.25,22.4 C13.+ 17.23,22.4 13.23,18.4 6.3,18.4 1.9,22.8 1.9,32.16 4.8,35.06 4.8,46 6.8,48 20.3,48 23.1,45.2 23.1,41.48 X1.3
LCD-V1
  Bottom 0.5: R38.1 R45.1 R51.1 21.25,72.4 C24.+ 17.23,72.4 13.23,68.4 6.3,68.4 1.9,72.8 1.9,82.16 4.8,85.06 4.8,96 6.8,98 20.3,98 23.1,95.2 23.1,91.48 X2.3
LCD_ENABLE  (via drill 0.5)
  Top 0.5: v48.5,28 60.09,28 60.59,27.5 61.41,27.5 62.41,28.5 71.41,28.5 71.91,29 74.91,29 81,35.09 81,37.5 v80.5,38
  Bottom 0.5: R27.2 81.55,36.95 v80.5,38 | U1.10 48.52,28 v48.5,28
LCD_ENABLE1  (via drill 0.5)
  Top 0.5: v48.5,78 60.09,78 60.59,77.5 61.41,77.5 62.41,78.5 71.41,78.5 71.91,79 74.91,79 81,85.09 81,87.5 v80.5,88
  Bottom 0.5: R54.2 81.55,86.95 v80.5,88 | U5.10 48.52,78 v48.5,78
LED1
  Bottom 0.5: U1.14 51.19,24.2 52.51,24.2 60.2,31.89 60.2,34.66 63.44,37.9 75.77,37.9 77.8,39.93 77.8,42.33 80.52,45.05 98.05,45.05 98.9,44.2 98.9,35.8 97.7,34.6 R4.1
LED1.K
  Bottom 0.3: LED1.C 93.25,34.5 R4.2
LED1.K1
  Bottom 0.3: LED4.C 93.25,84.5 R60.2
LED2
  Bottom 0.5: U5.14 51.19,74.2 52.51,74.2 60.2,81.89 60.2,84.66 63.44,87.9 75.77,87.9 77.8,89.93 77.8,92.33 80.52,95.05 98.05,95.05 98.9,94.2 98.9,85.8 97.7,84.6 R60.1
LED2.K
  Bottom 0.3: LED2.C 96.85,32.15 96.45,31.75 96.45,30.1 94.85,28.5 R12.2
LED2.K1
  Bottom 0.3: LED5.C 96.85,82.15 96.45,81.75 96.45,80.1 94.85,78.5 R49.2
LED3K
  Bottom 0.5: 80.95,23 LED3.C 78.1,23.05 R23.2
LED3K1
  Bottom 0.5: 80.95,73 LED6.C 78.1,73.05 R63.2
MCLR  (via drill 0.5)
  Top 0.5: v48.8,18.7 48.8,20.5 v45.1,24.2
  Bottom 0.5: R8.1 R9.1 3.55,14.85 C8.+ 3.6,16.5 4.7,17.6 16.99,17.6 19.19,15.4 46.16,15.4 48.8,18.04 v48.8,18.7 | U1.18 46.67,24.2 v45.1,24.2
MCLR1  (via drill 0.5)
  Top 0.5: v48.8,68.7 48.8,70.5 v45.1,74.2
  Bottom 0.5: R57.1 R33.1 3.55,64.85 C22.+ 3.6,66.5 4.7,67.6 16.99,67.6 19.19,65.4 46.16,65.4 48.8,68.04 v48.8,68.7 | U5.18 46.67,74.2 v45.1,74.2
P1-1
  Bottom 0.5: U$1.1 2.5,4.8 5.45,7.75 R8.2
P1-2
  Bottom 0.5: U$2.1 2.5,54.8 5.45,57.75 R57.2
PROG
  Bottom 0.3: U2.5 93.8,22.75 R18.1
PROG1
  Bottom 0.3: U7.5 93.8,72.75 R50.1
Q1.D
  Bottom 0.5: R19.2 64.55,21.15 Q1.3
Q1.D1
  Bottom 0.5: R55.2 64.55,71.15 Q7.3
Q1.G
  Bottom 0.5: Q1.1 60.7,20.05 R17.1
Q1.G1
  Bottom 0.5: Q7.1 60.7,70.05 R47.1
Q2.G
  Bottom 0.5: Q2.1 63.35,30.15 62.65,29.45 R20.2 R19.1
Q2.G1
  Bottom 0.5: Q5.1 63.35,80.15 62.65,79.45 R39.2 R55.1
Q2.S
  Bottom 0.5: Q2.2 C11.+ 67.7,31.5 69.45,31.5 R21.2
Q2.S1
  Bottom 0.5: Q5.2 C41.+ 67.7,81.5 69.45,81.5 R40.2
Q3.D
  Bottom 0.5: R30.2 65.4,41.5 Q3.3
Q3.D1
  Bottom 0.5: R58.2 65.4,91.5 Q8.3
Q3.G
  Bottom 0.5: Q3.1 62.75,40.1 R29.1
Q3.G1
  Bottom 0.5: Q8.1 62.75,90.1 R52.1
Q4.G
  Bottom 0.5: R30.1 64.65,45.95 63.6,44.9 C19.+ 61.65,44.9 R31.2 59.3,45.55 Q4.1
Q4.G1
  Bottom 0.5: R58.1 64.65,95.95 63.6,94.9 C23.+ 61.65,94.9 R59.2 59.3,95.55 Q6.1
Q4.S
  Bottom 0.5: Q4.2 R32.1
Q4.S1
  Bottom 0.5: Q6.2 R64.1
RA0
  Bottom 0.5: R21.1 69.5,34.6 68.35,35.75 R22.2 63.55,35.75 61.8,34 61.8,31.23 51.67,21.1 48.63,21.1 U1.19
RA1
  Bottom 0.5: R16.1 R17.2 48.31,20.3 U1.20
RA2
  Bottom 0.5: U1.21 47.3,20.18 47.3,17.67 45.83,16.2 26.8,16.2 23.4,19.6 R25.2
RA3
  Bottom 0.5: U1.22 46.5,19.84 46.5,18 45.5,17 28,17 25.4,19.6 R24.2
RA4
  Bottom 0.5: U5.21 47.3,70.17 47.3,67.67 45.83,66.2 26.8,66.2 23.4,69.6 R45.2
RA5
  Bottom 0.5: R40.1 69.5,84.6 68.35,85.75 R46.2 63.55,85.75 61.8,84 61.8,81.23 51.67,71.1 48.63,71.1 U5.19
RA6
  Bottom 0.5: U5.22 46.5,69.84 46.5,68 45.5,67 28,67 25.4,69.6 R38.2
RA7
  Bottom 0.5: R48.1 R47.2 48.31,70.3 U5.20
SW1.1  (via drill 0.5)
  Top 0.5: v5.4,25 5.4,27.7 5.02,28.08 SW1.1
  Bottom 0.5: R13.2 v5.4,25
SW1.2  (via drill 0.5)
  Top 0.5: v7.7,25 7.7,27.7 7.06,28.34 SW1.2
  Bottom 0.5: R14.2 v7.7,25
SW1.3
  Bottom 0.5: SW1.3 9.1,31.8 10.35,33.05 16.7,33.05 R10.2
SW1.4  (via drill 0.5)
  Top 0.5: v10,25 10,27.7 11.14,28.84 SW1.4
  Bottom 0.5: R15.2 v10,25
SW1.5  (via drill 0.5)
  Top 0.5: v5.4,75 5.4,77.7 5.02,78.08 SW2.1
  Bottom 0.5: R34.2 v5.4,75
SW1.6  (via drill 0.5)
  Top 0.5: v7.7,75 7.7,77.7 7.06,78.34 SW2.2
  Bottom 0.5: R35.2 v7.7,75
SW1.7  (via drill 0.5)
  Top 0.5: v10,75 10,77.7 11.14,78.84 SW2.4
  Bottom 0.5: R36.2 v10,75
SW1.8
  Bottom 0.5: SW2.3 9.1,81.8 10.35,83.05 16.7,83.05 R44.2
SW1.A
  Bottom 0.5: R1.1 R6.1 20.45,28.85 C2.+ 5.1,28.4 3.5,30 3.5,31.5 9.1,37.1 SW1.B
SW1.A1
  Bottom 0.5: R42.1 R61.1 20.45,78.85 C26.+ 5.1,78.4 3.5,80 3.5,81.5 9.1,87.1 SW2.B
SW1.B
  Bottom 0.5: R2.1 R7.1 28.85,28.8 27.1,28.8 C4.+ 25.1,26.8 5.57,26.8 2.7,29.67 2.7,31.83 6.56,35.69 SW1.A
SW1.B1
  Bottom 0.5: R41.1 R62.1 28.85,78.8 27.1,78.8 C27.+ 25.1,76.8 5.57,76.8 2.7,79.67 2.7,81.83 6.56,85.69 SW2.A
U4.1
  Bottom 0.3: U2.1 92.15,24.55 92.5,24.9 92.5,27 92.05,27.45 R12.1
U4.2
  Bottom 0.3: U7.1 92.15,74.55 92.5,74.9 92.5,77 92.05,77.45 R49.1
U4.3
  Bottom 0.5: R27.1 82.5,32.4 81.57,31.47 U4.3
U4.4
  Bottom 0.5: R54.1 82.5,82.4 81.57,81.47 U6.3
VBAT
  Bottom 0.5: C12.+ 75.64,26.7 U3.3 | 78.95,25.6 78.95,25.45 78.41,24.91 C12.+ | 78.95,25.6 C14.+ 83.98,25.6 84.19,25.81 | 84.19,25.81 F1.2 84.5,27.5 85.6,28.6 C15.+ 84.02,30 U4.1 | U2.3 88.95,26.45 C10.+ 87.4,26.9 86.31,25.81 84.19,25.81 | R20.1 64.3,27.25 Q2.3 64.9,29.5 69.26,29.5 C12.+ | U3.1 78.95,25.6 | R23.1 76.15,21.05 73.85,23.35 C12.+
VBAT1
  Bottom 0.5: C40.+ 75.64,76.7 U8.3 | 78.95,75.6 78.95,75.45 78.41,74.91 C40.+ | 78.95,75.6 C34.+ 83.98,75.6 84.19,75.81 | 84.19,75.81 F2.2 84.5,77.5 85.6,78.6 C30.+ 84.02,80 U6.1 | U7.3 88.95,76.45 C39.+ 87.4,76.9 86.31,75.81 84.19,75.81 | R39.1 64.3,77.25 Q5.3 64.9,79.5 69.26,79.5 C40.+ | U8.1 78.95,75.6 | R63.1 76.15,71.05 73.85,73.35 C40.+
VUSB
  Bottom 0.3: U2.4 94.65,26.45 94.8,26.3 J1.1 96.7,26.3 97,26.6 97,29.35 97.7,30.05 LED2.A
VUSB1
  Bottom 0.3: U7.4 94.65,76.45 94.8,76.3 J2.1 96.7,76.3 97,76.6 97,79.35 97.7,80.05 LED5.A

## Text on the board
_bPlace: BT1 | BT1
_bNames: C19 | Q4 | R32 | R30 | R31 | R28 | C16 | Q3 | R5 | C5 | R10 | R11 | C9 | R29 | R3 | R22 | R27 | B1 | U1 | C20 | C17 | C21 | R4 | U4 | C4 | C18 | LED1 | LED2 | R7 | R2 | C1 | C3 | R21 | Q2 | C15 | C11 | C12 | R12 | SW1 | U3 | R6 | R1 | C2 | C14 | R20 | C7 | C6 | R19 | C13 | R26 | R25 | R24 | U2 | C10 | R16 | R23 | R18 | Q1 | R13 | R14 | R15 | R17 | LED3 | F1 | J1 | C8 | R9 | R8 | C19 | Q4 | R32 | R30 | R31 | R28 | C16 | Q3 | R5 | C5 | R10 | R11 | C9 | R29 | R3 | R22 | R27 | B1 | U1 | C20 | C17 | C21 | R4 | U4 | C4 | C18 | LED1 | LED2 | R7 | R2 | C1 | C3 | R21 | Q2 | C15 | C11 | C12 | R12 | SW1 | U3 | R6 | R1 | C2 | C14 | R20 | C7 | C6 | R19 | C13 | R26 | R25 | R24 | U2 | C10 | R16 | R23 | R18 | Q1 | R13 | R14 | R15 | R17 | LED3 | F1 | J1 | C8 | R9 | R8